# Altium PCB PCIEx16toMXM3.0.PcbDoc
Units mm, origin at the board's own origin, x right, y up, seen from the top; angles counter-clockwise.
Board outline 167.65 x 110.97 mm, 4 copper layers (F.Cu, In1.Cu, In2.Cu, B.Cu); 20 components, 219 nets, 511 pads, 0 vias.
Unrouted connection lines stored in the file: 135.
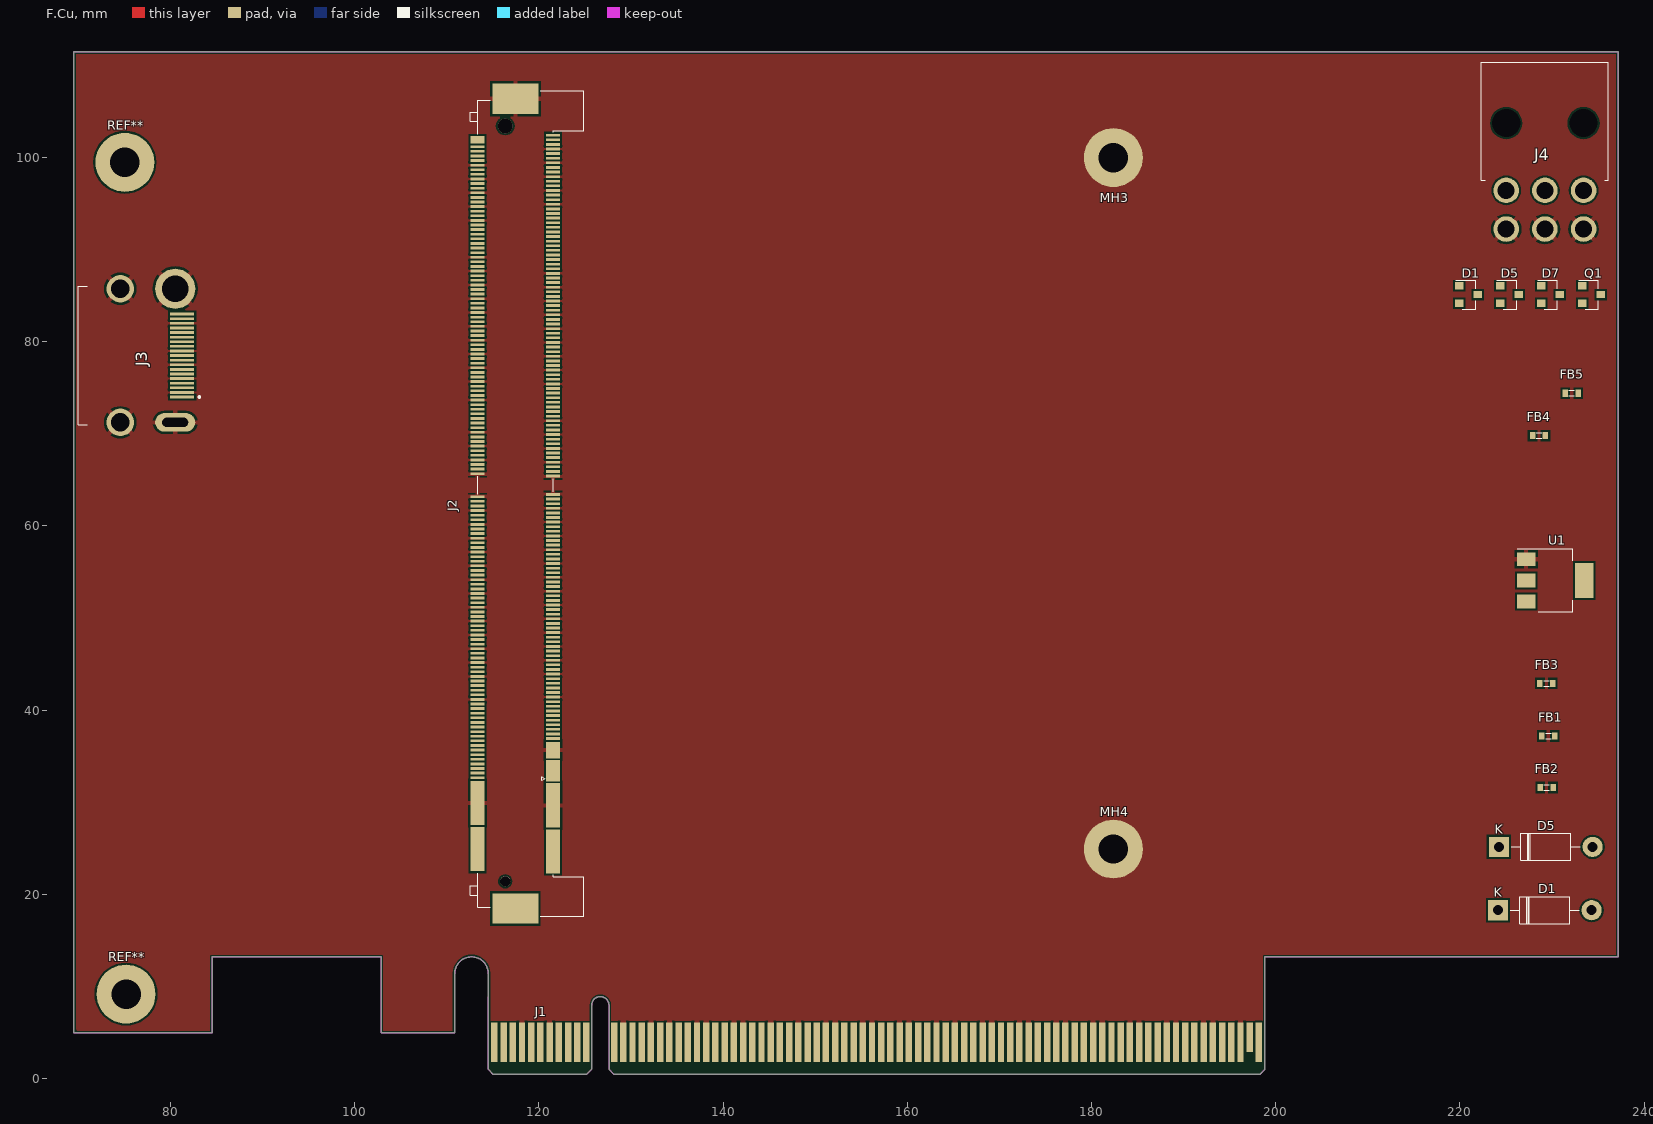
[diagram p0: F.Cu view]
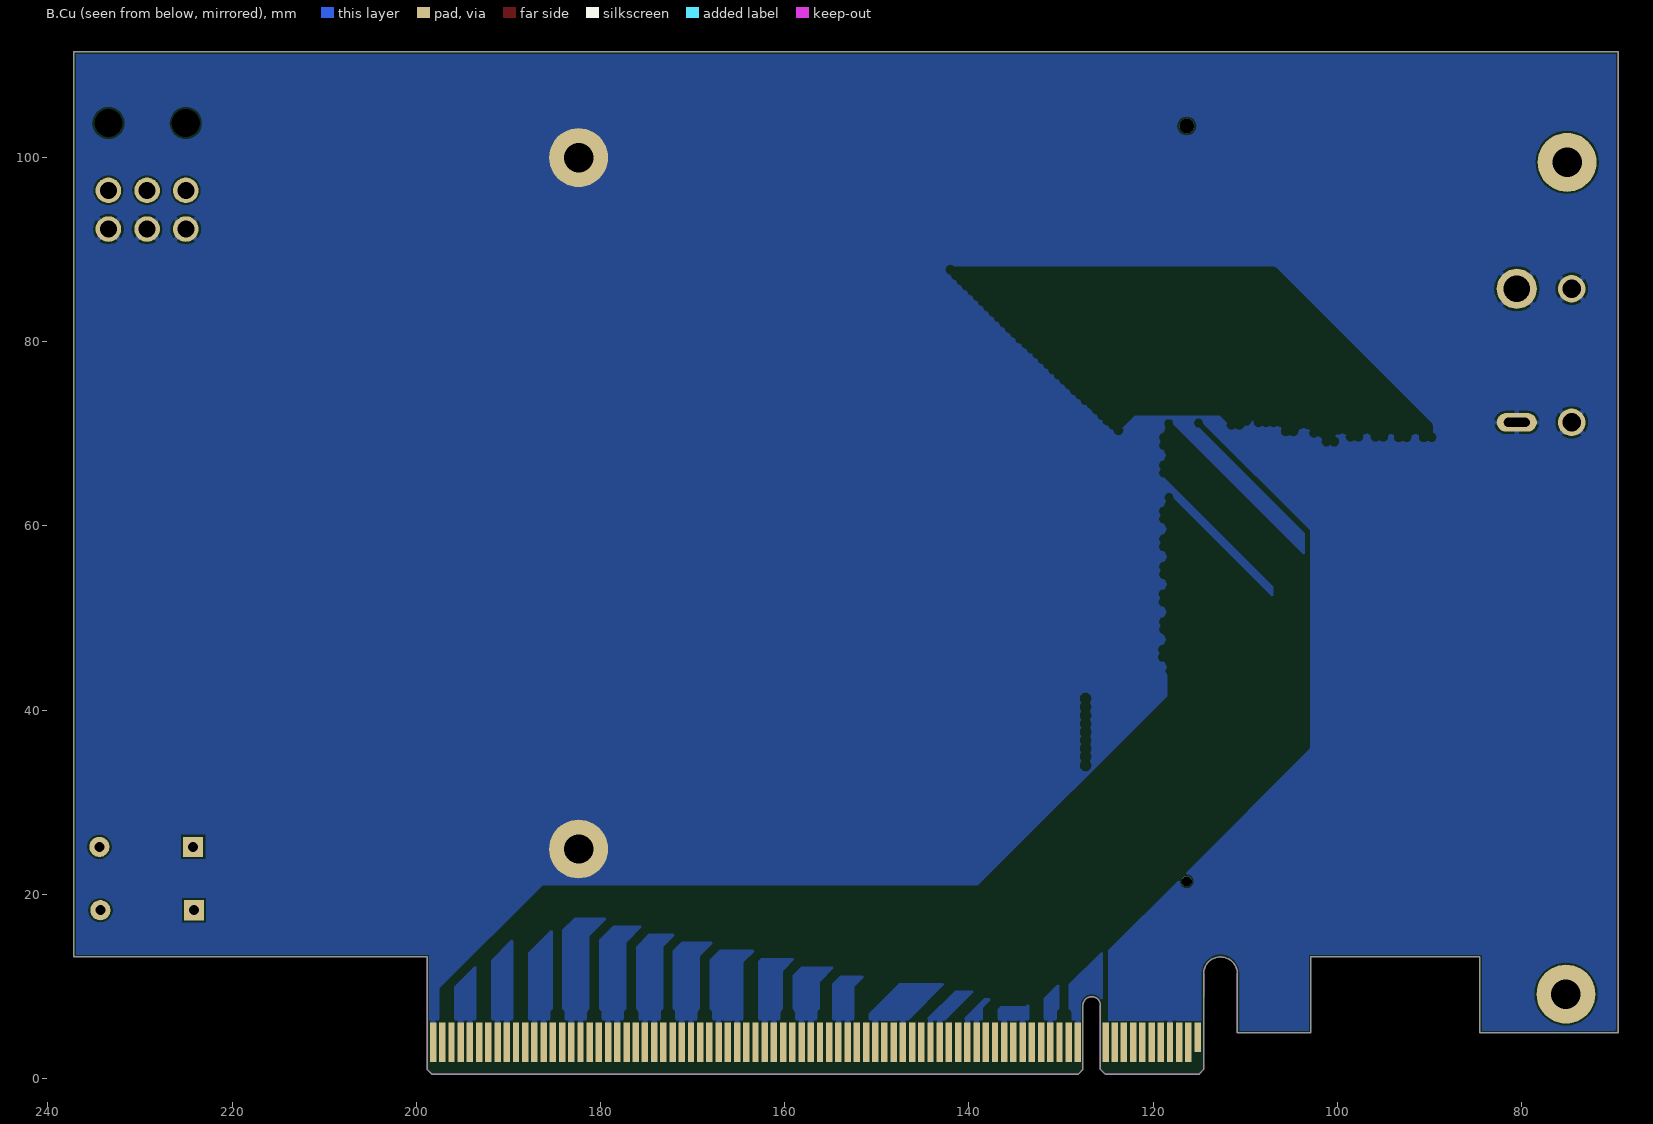
[diagram p1: B.Cu view, seen from below]

## Layer stack, top to bottom
F.Mask: solder mask 0.0102, Solder Resist, Dk 3.5
F.Cu: signal copper 0.0356
Dielectric 1: dielectric 0.32, FR-4, Dk 4.8
In1.Cu: signal copper 0.0356
Dielectric2: dielectric 0.32, FR-4, Dk 4.8
In2.Cu: signal copper 0.0356
Dielectric3: dielectric 0.32, FR-4, Dk 4.8
B.Cu: signal copper 0.0356
B.Mask: solder mask 0.0102, Solder Resist, Dk 3.5

## Board outline
198.82,13.22 198.82,8.9 198.82,1 198.32,0.5 128.12,0.5 127.62,1 127.62,7.95 ccw(c126.67,7.95) 125.72,7.95 125.72,1 125.22,0.5 115.02,0.5 114.52,1 114.52,8.9 114.52,11.395 ccw(c112.695,11.395) 110.87,4.97 102.87,4.97 102.87,13.22 84.52,13.22 84.52,4.97 69.52,4.97 69.532,111.47 237.17,111.47 237.17,13.22 198.82,13.22

## Design rules (kind name [scope] priority, off if disabled: settings)
Clearance "Clearence 0.2_NetClass" [InNetClass('Default')] p1: gap=0.2 ignorepadtopadclearanceinfootprint=FALSE
Clearance "Clearence 0.2_Polygon" [InNamedPolygon('B.Cu-GND') OR InNamedPolygon('F.Cu-GND')] p2: gap=0.2 ignorepadtopadclearanceinfootprint=FALSE
DiffPairsRouting [All] p1: maxlimit=0.254 minlimit=0.254 mostfreqgap=0.254 toplayer_minwidth=0.381 toplayer_maxwidth=0.381 toplayer_prefwidth=0.381 midlayer1_minwidth=0.381 midlayer1_maxwidth=0.381 midlayer1_prefwidth=0.381 midlayer2_minwidth=0.381 midlayer2_maxwidth=0.381 midlayer2_prefwidth=0.381 bottomlayer_minwidth=0.381 bottomlayer_maxwidth=0.381 bottomlayer_prefwidth=0.381 maxuncoupledlength=12.7
HoleSize "Hole Size (Default)" [All] p1: absolutevalues=TRUE maxlimit=10 minlimit=0 maxpercent=80.000 minpercent=20.000
MinimumSolderMaskSliver [All] p1: minsoldermaskwidth=0
PolygonConnect Polygon_F.Cu-GND_ConnectDirect [IsNamedPolygon('F.Cu-GND') vs IsVia] p1: connectstyle=Direct reliefconductorwidth=0.254 reliefentries=4 polygonreliefangle="90 Angle" airgapwidth=0.254
PolygonConnect Polygon_F.Cu-GND_ConnectRelief45 [IsNamedPolygon('F.Cu-GND') vs (IsThruPin or IsSMTPin) and (PadShape_AllLayers = 'Round')] p2: connectstyle=Relief reliefconductorwidth=0.508 reliefentries=4 polygonreliefangle="45 Angle" airgapwidth=0.25
PolygonConnect Polygon_F.Cu-GND_ConnectRelief90 [IsNamedPolygon('F.Cu-GND') vs (IsThruPin or IsSMTPin) and (PadShape_AllLayers <> 'Round')] p3: connectstyle=Relief reliefconductorwidth=0.508 reliefentries=4 polygonreliefangle="90 Angle" airgapwidth=0.25
PolygonConnect Polygon_B.Cu-GND_ConnectDirect [IsNamedPolygon('B.Cu-GND') vs IsVia] p4: connectstyle=Direct reliefconductorwidth=0.254 reliefentries=4 polygonreliefangle="90 Angle" airgapwidth=0.254
PolygonConnect Polygon_B.Cu-GND_ConnectRelief45 [IsNamedPolygon('B.Cu-GND') vs (IsThruPin or IsSMTPin) and (PadShape_AllLayers = 'Round')] p5: connectstyle=Relief reliefconductorwidth=0.508 reliefentries=4 polygonreliefangle="45 Angle" airgapwidth=0.25
PolygonConnect Polygon_B.Cu-GND_ConnectRelief90 [IsNamedPolygon('B.Cu-GND') vs (IsThruPin or IsSMTPin) and (PadShape_AllLayers <> 'Round')] p6: connectstyle=Relief reliefconductorwidth=0.508 reliefentries=4 polygonreliefangle="90 Angle" airgapwidth=0.25
RoutingVias [All] p1: holewidth=0.711 width=1.27 viastyle="Through Hole" minholewidth=0.711 minwidth=1.27 maxholewidth=0.711 maxwidth=1.27
SilkToSilkClearance [All] p1: silktosilkclearance=0
SilkToSolderMaskClearance [IsPad] p1: minsilkscreentomaskgap=0 clearancetoexposedcopper=TRUE
SolderMaskExpansion [All] p1: expansion=0.102 istentingtop=FALSE
Width [All] p1: maxlimit=10 minlimit=0.2 preferedwidth=0.254 toplayer_prefwidth=0.25 midlayer1_minwidth=0.254 midlayer1_maxwidth=0.254 midlayer2_minwidth=0.254 midlayer2_maxwidth=0.254 bottomlayer_prefwidth=0.25 minimp=50.000000 maximp=50.000000 favimp=50.000000
25 further rules are at their usual default settings.

## Classes and differential pairs
differential pair PET15: +PET15_P -PET15_N
differential pair PET14: +PET14_P -PET14_N
differential pair PET13: +PET13_P -PET13_N
differential pair PET12: +PET12_P -PET12_N
differential pair PET11: +PET11_P -PET11_N
differential pair PET10: +PET10_P -PET10_N
differential pair PET9: +PET9_P -PET9_N
differential pair PET8: +PET8_P -PET8_N
differential pair PET7: +PET7_P -PET7_N
differential pair PET6: +PET6_P -PET6_N
differential pair PET5: +PET5_P -PET5_N
differential pair PET4: +PET4_P -PET4_N
differential pair PET3: +PET3_P -PET3_N
differential pair PET2: +PET2_P -PET2_N
differential pair PET1: +PET1_P -PET1_N
differential pair PET0: +PET0_P -PET0_N
differential pair PER15: +PER15_P -PER15_N
differential pair PER14: +PER14_P -PER14_N
differential pair PER13: +PER13_P -PER13_N
differential pair PER12: +PER12_P -PER12_N
differential pair PER11: +PER11_P -PER11_N
differential pair PER10: +PER10_P -PER10_N
differential pair PER9: +PER9_P -PER9_N
differential pair PER8: +PER8_P -PER8_N
differential pair PER7: +PER7_P -PER7_N
differential pair PER6: +PER6_P -PER6_N
differential pair PER5: +PER5_P -PER5_N
differential pair PER4: +PER4_P -PER4_N
differential pair PER3: +PER3_P -PER3_N
differential pair PER2: +PER2_P -PER2_N
differential pair PER1: +PER1_P -PER1_N
differential pair PER0: +PER0_P -PER0_N

## Components (designator, comment, footprint, x,y, rotation, side; value= is the part's Value field where it differs from the comment)
D1 "PMEG4010ET" D_SOT-23_ANK 220.925,85.121 r0 top
D1 "1N4007" D_DO-41_SOD81_P10.16mm_Horizontal 224.124,18.291 r0 top
D5 "1N4007" D_DO-41_SOD81_P10.16mm_Horizontal 224.231,25.159 r0 top
D5 "PMEG4010ET" D_SOT-23_ANK 225.375,85.121 r0 top
D7 "PMEG4010ET" D_SOT-23_ANK 229.825,85.121 r0 top
FB1 "BLM18PG121SN1D" 0603 229.591,37.199 r0 top
FB2 "BLM18PG121SN1D" 0603 229.402,31.611 r0 top
FB3 "BLM18PG121SN1D" 0603 229.384,42.901 r0 top
FB4 "BLM18PG121SN1D" 0603 228.58,69.816 r0 top
FB5 "BLM18PG121SN1D" 0603 232.13,74.416 r0 top
J1 "Bus_PCI_Express_x16" BUS_PCIexpress_x16 115.17,3.95 r0 top
J2 "MXM3.0" JAE_MM70-314-310B1 117.45,62.421 r90 top
J3 "208658-1081" 2086581081 76.048,78.499 r270 top
J4 "45558-0003" 455580003 225.019,96.431 r0 top
MH3 "MountingHole_3.2mm_M3_Pad" MountingHole_3.2mm_M3_Pad 182.372,99.987 r180 top
MH4 "MountingHole_3.2mm_M3_Pad" MountingHole_3.2mm_M3_Pad 182.372,24.93 r0 top
Q1 "BC848" SOT-23 234.275,85.121 r0 top
REF** "MountingHole_3.2mm_M3_Pad" MountingHole_3.2mm_M3_Pad 75.057,99.479 r0 top
REF** "MountingHole_3.2mm_M3_Pad" MountingHole_3.2mm_M3_Pad 75.184,9.182 r0 top
U1 "AMS1117-5.0" SOT-223-3_TabPin2 230.327,54.09 r0 top

## Footprints (in the part's own frame and the unit in brackets; to place one, negate y for a bottom-side part, rotate by r counter-clockwise, add the part's x,y. Pads: shape width x height; smd on the part's side, far side on the other; paste and mask are expansions set on the pad)
0603 [mm]
  rect 0.6x0.8 smd mask+0.05: 1(-0.7,0) 2(0.7,0)
  silkscreen extent -0.3,-0.3 0.3,0.3
455580003 [mm]
  round 2.775 hole 1.85 paste-2.775 mask+0.05: 1(0,0) 2(4.2,0) 3(8.4,0) 4(0,-4.2) 5(4.2,-4.2) 6(8.4,-4.2)
  oval 3.05x0 hole 3.05 paste-3.05 mask+0.05: MH1(0,7.3) MH2(8.4,7.3)
  silkscreen extent -2.7,1.1 11.1,13.9
2086581081 [mm]
  rect 0.3x2.6 smd mask+0.05: 1(4.5,5.235) 2(4,5.235) 3(3.5,5.235) 4(3,5.235) 5(2.5,5.235) 6(2,5.235) 7(1.5,5.235) 8(1,5.235) 9(0.5,5.235) 10(0,5.235) 11(-0.5,5.235) 12(-1,5.235) 13(-1.5,5.235) 14(-2,5.235) 15(-2.5,5.235) 16(-3,5.235) 17(-3.5,5.235) 18(-4,5.235) 19(-4.5,5.235)
  round 4.365 hole 2.91 paste-4.365 mask+0.05: MH1(-7.25,4.475)
  rrect100% 2x4.365 hole 2.8 slot 1 at 0 deg paste-4.365 mask+0.05: MH2(7.25,4.475)
  round 2.985 hole 1.99 paste-2.985 mask+0.05: MH3(-7.25,-1.485) MH4(7.25,-1.485)
  silkscreen extent -7.5,-6.08 7.5,7.2
BUS_PCIexpress_x16 [mm]
  rect 0.7x3.2 smd far side paste-3.2 mask+0.05: A1(0,0.55)
  rect 0.7x4.3 smd far side paste-4.3 mask+0.05: A2(1,0) A3(2,0) A4(3,0) A5(4,0) A6(5,0) A7(6,0) A8(7,0) A9(8,0) A10(9,0) A11(10,0) A12(13,0) A13(14,0) A14(15,0) A15(16,0) A16(17,0) A17(18,0) A18(19,0) A19(20,0) A20(21,0) A21(22,0) A22(23,0) A23(24,0) A24(25,0) A25(26,0) A26(27,0) A27(28,0) A28(29,0) A29(30,0) A30(31,0) A31(32,0) A32(33,0) A33(34,0) A34(35,0) A35(36,0) A36(37,0) A37(38,0) A38(39,0) A39(40,0) A40(41,0) A41(42,0) A42(43,0) A43(44,0) A44(45,0) A45(46,0) A46(47,0) A47(48,0) A48(49,0) A49(50,0) A50(51,0) A51(52,0) A52(53,0) A53(54,0) A54(55,0) A55(56,0) A56(57,0) A57(58,0) A58(59,0) A59(60,0) A60(61,0) A61(62,0) A62(63,0) A63(64,0) A64(65,0) A65(66,0) A66(67,0) A67(68,0) A68(69,0) A69(70,0) A70(71,0) A71(72,0) A72(73,0) A73(74,0) A74(75,0) A75(76,0) A76(77,0) A77(78,0) A78(79,0) A79(80,0) A80(81,0) A81(82,0) A82(83,0)
  rect 0.7x4.3 smd paste-4.3 mask+0.05: B1(0,0) B2(1,0) B3(2,0) B4(3,0) B5(4,0) B6(5,0) B7(6,0) B8(7,0) B9(8,0) B10(9,0) B11(10,0) B12(13,0) B13(14,0) B14(15,0) B15(16,0) B16(17,0) B17(18,0) B18(19,0) B19(20,0) B20(21,0) B21(22,0) B22(23,0) B23(24,0) B24(25,0) B25(26,0) B26(27,0) B27(28,0) B28(29,0) B29(30,0) B30(31,0) B31(32,0) B32(33,0) B33(34,0) B34(35,0) B35(36,0) B36(37,0) B37(38,0) B38(39,0) B39(40,0) B40(41,0) B41(42,0) B42(43,0) B43(44,0) B44(45,0) B45(46,0) B46(47,0) B47(48,0) B48(49,0) B49(50,0) B50(51,0) B51(52,0) B52(53,0) B53(54,0) B54(55,0) B55(56,0) B56(57,0) B57(58,0) B58(59,0) B59(60,0) B60(61,0) B61(62,0) B62(63,0) B63(64,0) B64(65,0) B65(66,0) B66(67,0) B67(68,0) B68(69,0) B69(70,0) B70(71,0) B71(72,0) B72(73,0) B73(74,0) B74(75,0) B75(76,0) B76(77,0) B77(78,0) B78(79,0) B79(80,0) B80(81,0) B82(83,0)
  rect 0.7x3.2 smd paste-3.2 mask+0.05: B81(82,0.55)
D_DO-41_SOD81_P10.16mm_Horizontal [mm]
  rect 2.2x2.2 hole 1.1 paste-2.2 mask+0.05: 1(0,0)
  rrect100% 2.2x2.2 hole 1.1 paste-2.2 mask+0.05: 2(10.16,0)
  silkscreen extent 1.34,-1.47 8.82,1.47
D_SOT-23_ANK [mm]
  rect 0.9x0.8 smd mask+0.05: 1(1,0) 2(-1,0.95) Un1(-1,-0.95)
  silkscreen extent -1.4,-1.58 0.76,1.58
JAE_MM70-314-310B1 [mm]
  rect 2.3x1.5 smd mask+0.05: 1(-29,-4.1) 3(-29,-4.1) 5(-29,-4.1) 7(-29,-4.1) 9(-29,-4.1)
  rect 0.3x1.5 smd mask+0.05: 2(-29.75,4.1) 4(-29.25,4.1) 6(-28.75,4.1) 8(-28.25,4.1) 10(-27.75,4.1) 12(-27.25,4.1) 14(-26.75,4.1) 16(-26.25,4.1) 18(-25.75,4.1) 19(-25.5,-4.1) 20(-25.25,4.1) 21(-25,-4.1) 22(-24.75,4.1) 23(-24.5,-4.1) 24(-24.25,4.1) 25(-24,-4.1) 26(-23.75,4.1) 27(-23.5,-4.1) 28(-23.25,4.1) 29(-23,-4.1) 30(-22.75,4.1) 31(-22.5,-4.1) 32(-22.25,4.1) 33(-22,-4.1) 34(-21.75,4.1) 35(-21.5,-4.1) 36(-21.25,4.1) 37(-21,-4.1) 38(-20.75,4.1) 39(-20.5,-4.1) 40(-20.25,4.1) 41(-20,-4.1) 42(-19.75,4.1) 43(-19.5,-4.1) 44(-19.25,4.1) 45(-19,-4.1) 46(-18.75,4.1) 47(-18.5,-4.1) 48(-18.25,4.1) 49(-18,-4.1) 50(-17.75,4.1) 51(-17.5,-4.1) 52(-17.25,4.1) 53(-17,-4.1) 54(-16.75,4.1) 55(-16.5,-4.1) 56(-16.25,4.1) 57(-16,-4.1) 58(-15.75,4.1) 59(-15.5,-4.1) 60(-15.25,4.1) 61(-15,-4.1) 62(-14.75,4.1) 63(-14.5,-4.1) 64(-14.25,4.1) 65(-14,-4.1) 66(-13.75,4.1) 67(-13.5,-4.1) 68(-13.25,4.1) 69(-13,-4.1) 70(-12.75,4.1) 71(-12.5,-4.1) 72(-12.25,4.1) 73(-12,-4.1) 74(-11.75,4.1) 75(-11.5,-4.1) 76(-11.25,4.1) 77(-11,-4.1) 78(-10.75,4.1) 79(-10.5,-4.1) 80(-10.25,4.1) 81(-10,-4.1) 82(-9.75,4.1) 83(-9.5,-4.1) 84(-9.25,4.1) 85(-9,-4.1) 86(-8.75,4.1) 87(-8.5,-4.1) 88(-8.25,4.1) 89(-8,-4.1) 90(-7.75,4.1) 91(-7.5,-4.1) 92(-7.25,4.1) 93(-7,-4.1) 94(-6.75,4.1) 95(-6.5,-4.1) 96(-6.25,4.1) 97(-6,-4.1) 98(-5.75,4.1) 99(-5.5,-4.1) 100(-5.25,4.1) 101(-5,-4.1) 102(-4.75,4.1) 103(-4.5,-4.1) 104(-4.25,4.1) 105(-4,-4.1) 106(-3.75,4.1) 107(-3.5,-4.1) 108(-3.25,4.1) 109(-3,-4.1) 110(-2.75,4.1) 111(-2.5,-4.1) 112(-2.25,4.1) 113(-2,-4.1) 114(-1.75,4.1) 115(-1.5,-4.1) 116(-1.25,4.1) 117(-1,-4.1) 118(-0.75,4.1) 119(-0.5,-4.1) 120(-0.25,4.1) 121(0,-4.1) 122(0.25,4.1) 123(0.5,-4.1) 124(0.75,4.1) 125(1,-4.1) 133(3,-4.1) 134(3.25,4.1) 135(3.5,-4.1) 136(3.75,4.1) 137(4,-4.1) 138(4.25,4.1) 139(4.5,-4.1) 140(4.75,4.1) 141(5,-4.1) 142(5.25,4.1) 143(5.5,-4.1) 144(5.75,4.1) 145(6,-4.1) 146(6.25,4.1) 147(6.5,-4.1) 148(6.75,4.1) 149(7,-4.1) 150(7.25,4.1) 151(7.5,-4.1) 152(7.75,4.1) 153(8,-4.1) 154(8.25,4.1) 155(8.5,-4.1) 156(8.75,4.1) 157(9,-4.1) 158(9.25,4.1) 159(9.5,-4.1) 160(9.75,4.1) 161(10,-4.1) 162(10.25,4.1) 163(10.5,-4.1) 164(10.75,4.1) 165(11,-4.1) 166(11.25,4.1) 167(11.5,-4.1) 168(11.75,4.1) 169(12,-4.1) 170(12.25,4.1) 171(12.5,-4.1) 172(12.75,4.1) 173(13,-4.1) 174(13.25,4.1) 175(13.5,-4.1) 176(13.75,4.1) 177(14,-4.1) 178(14.25,4.1) 179(14.5,-4.1) 180(14.75,4.1) 181(15,-4.1) 182(15.25,4.1) 183(15.5,-4.1) 184(15.75,4.1) 185(16,-4.1) 186(16.25,4.1) 187(16.5,-4.1) 188(16.75,4.1) 189(17,-4.1) 190(17.25,4.1) 191(17.5,-4.1) 192(17.75,4.1) 193(18,-4.1) 194(18.25,4.1) 195(18.5,-4.1) 196(18.75,4.1) 197(19,-4.1) 198(19.25,4.1) 199(19.5,-4.1) 200(19.75,4.1) 201(20,-4.1) 202(20.25,4.1) 203(20.5,-4.1) 204(20.75,4.1) 205(21,-4.1) 206(21.25,4.1) 207(21.5,-4.1) 208(21.75,4.1) 209(22,-4.1) 210(22.25,4.1) 211(22.5,-4.1) 212(22.75,4.1) 213(23,-4.1) 214(23.25,4.1) 215(23.5,-4.1) 216(23.75,4.1) 217(24,-4.1) 218(24.25,4.1) 219(24.5,-4.1) 220(24.75,4.1) 221(25,-4.1) 222(25.25,4.1) 223(25.5,-4.1) 224(25.75,4.1) 225(26,-4.1) 226(26.25,4.1) 227(26.5,-4.1) 228(26.75,4.1) 229(27,-4.1) 230(27.25,4.1) 231(27.5,-4.1) 232(27.75,4.1) 233(28,-4.1) 234(28.25,4.1) 235(28.5,-4.1) 236(28.75,4.1) 237(29,-4.1) 238(29.25,4.1) 239(29.5,-4.1) 240(29.75,4.1) 241(30,-4.1) 242(30.25,4.1) 243(30.5,-4.1) 244(30.75,4.1) 245(31,-4.1) 246(31.25,4.1) 247(31.5,-4.1) 248(31.75,4.1) 249(32,-4.1) 250(32.25,4.1) 251(32.5,-4.1) 252(32.75,4.1) 253(33,-4.1) 254(33.25,4.1) 255(33.5,-4.1) 256(33.75,4.1) 257(34,-4.1) 258(34.25,4.1) 259(34.5,-4.1) 260(34.75,4.1) 261(35,-4.1) 262(35.25,4.1) 263(35.5,-4.1) 264(35.75,4.1) 265(36,-4.1) 266(36.25,4.1) 267(36.5,-4.1) 268(36.75,4.1) 269(37,-4.1) 270(37.25,4.1) 271(37.5,-4.1) 272(37.75,4.1) 273(38,-4.1) 274(38.25,4.1) 275(38.5,-4.1) 276(38.75,4.1) 277(39,-4.1) 279(39.5,-4.1) 281(40,-4.1)
  rect 1.8x1.5 smd mask+0.05: 11(-26.75,-4.1) 13(-26.75,-4.1) 15(-26.75,-4.1) 17(-26.75,-4.1)
  rect 0.8x1.5 smd mask+0.05: 278(39.5,4.1) 280(39.5,4.1)
  rect 4.8x1.5 smd mask+0.05: E1(-37.75,-4.1) E2(-37.5,4.1) E3(-32.75,-4.1) E4(-32.5,4.1)
  rect 3.3x5 smd mask+0.05: MP(-43.95,0) MP(43.95,0)
  round 1.1 hole 1.1 paste-1.1 mask+0.05: Un1(-41,1.1)
  round 1.6 hole 1.6 paste-1.6 mask+0.05: Un2(41,1.1)
  silkscreen extent -44.8,-7.45 44.8,4.9
MountingHole_3.2mm_M3_Pad [mm]
  round 6.4 hole 3.2 paste-6.4 mask+0.05: 1(0,0)
SOT-23 [mm]
  rect 0.9x0.8 smd mask+0.05: 1(-1,0.95) 2(-1,-0.95) 3(1,0)
  silkscreen extent -1.4,-1.58 0.76,1.58
SOT-223-3_TabPin2 [mm]
  rect 2x1.5 smd mask+0.05: 1(-3.15,2.3) 2(-3.15,0) 3(-3.15,-2.3)
  rect 2x3.8 smd mask+0.05: 2(3.15,0)
  silkscreen extent -4.1,-3.41 1.91,3.41

## Part data
D1: library part D_SOT-23_ANK, "SOT-23, Single Diode"
D1: library part PMEG4010ET
D5: library part D_DO-41_SOD81_P10.16mm_Horizontal, "Diode, DO-41_SOD81 series, Axial, Horizontal, pin pitch=10.16mm, , length*diameter=5.2*2.7mm^2, , http://www.diodes.com/_files/packages/DO-41%20(Plastic).pdf"
FB1 FB2 FB3 FB4 FB5: library part BLM18PG121SN1D-dk_Ferrite-Beads-and-Chips
MH3 MH4 REF** REF**: "Mounting Hole 3.2mm, M3"

## Nets (pads, with @x,y where several pads share a name; then routed paths per layer and width w, separated by ;. In a path a pad name is that pad's centre, name@x,y a point inside that pad or via, vN(x,y) a via of type N, cw(c..) or ccw(c..) an arc to the next point about the centre after c; other vN are vias at no path point)
+3.3VA: J1.B10 Q1.3
+3V3: J1.A9 J1.A10 J1.B8 J2.278 J2.280
+5V: D5.1@224.231,25.159 J2.1 J2.3 J2.5 J2.7 J2.9 J3.18
+12V: D1.2 D7.2 J1.A2 J1.A3 J1.B1 J1.B2 J1.B3 J2.E1 J2.E2 J4.1 J4.2 J4.3
C1: FB5.1
C2: FB4.2
C3: FB3.2
C4: FB1.2
CEC: J2.29 J3.13
CK_N: J2.176 J3.12
CK_P: J2.178 J3.10
D0_N: J2.200 J3.9
D0_P: J2.202 J3.7
D1_N: J2.194 J3.6
D1_P: J2.196 J3.4
D2_N: J2.188 J3.3
D2_P: J2.190 J3.1
DP_A_HPD: J2.276
DP_D_AUX: J2.232
DP_D_AUX#: J2.230
DP_D_HPD: J2.236
DP_D_L3: J2.208 J2.214 J2.220 J2.226
DP_D_L3#: J2.206 J2.212 J2.218 J2.224
Enable: J2.8
GND: J1.A4 J1.A12 J1.A15 J1.A18 J1.A20 J1.A23 J1.A24 J1.A27 J1.A28 J1.A31 J1.A34 J1.A37 J1.A38 J1.A41 J1.A42 J1.A45 J1.A46 J1.A49 J1.A51 J1.A54 J1.A55 J1.A58 J1.A59 J1.A62 J1.A63 J1.A66 J1.A67 J1.A70 J1.A71 J1.A74 J1.A75 J1.A78 J1.A79 J1.A82 J1.B4 J1.B7 J1.B13 J1.B16 J1.B18 J1.B21 J1.B22 J1.B25 J1.B26 J1.B29 J1.B32 J1.B35 J1.B36 J1.B39 J1.B40 J1.B43 J1.B44 J1.B47 J1.B49 J1.B52 J1.B53 J1.B56 J1.B57 J1.B60 J1.B61 J1.B64 J1.B65 J1.B68 J1.B69 J1.B72 J1.B73 J1.B76 J1.B77 J1.B80 J2.11 J2.13 J2.15 J2.17 J2.36 J2.37 J2.46 J2.47 J2.52 J2.53 J2.58 J2.59 J2.64 J2.65 J2.70 J2.71 J2.76 J2.77 J2.82 J2.83 J2.88 J2.89 J2.94 J2.95 J2.100 J2.101 J2.106 J2.107 J2.112 J2.113 J2.118 J2.119 J2.124 J2.125 J2.133 J2.134 J2.139 J2.140 J2.145 J2.146 J2.151 J2.152 J2.157 J2.166 J2.173 J2.174 J2.179 J2.180 J2.185 J2.186 J2.191 J2.192 J2.197 J2.198 J2.203 J2.204 J2.209 J2.210 J2.215 J2.216 J2.221 J2.222 J2.228 J2.244 J2.250 J2.251 J2.256 J2.257 J2.262 J2.263 J2.268 J2.269 J2.275 J2.E3 J2.E4 J2.MP@117.45,106.371 J3.2 J3.5 J3.8 J3.11 J3.17 J3.MH1 J3.MH2 J3.MH3 J3.MH4 J4.4 J4.5 J4.6 MH3.1 MH4.1 U1.1
Net-(C1-Pad1): D1.1 U1.3
Net-(C4-Pad1): J2.279
Net-(C5-Pad1): J2.277
Net-(C6-Pad1): J2.273
Net-(C7-Pad1): J2.271
Net-(C8-Pad1): J2.267
Net-(C9-Pad1): J2.265
Net-(C10-Pad1): J2.261
Net-(C11-Pad1): J2.259
Net-(C12-Pad1): J2.255
Net-(C13-Pad1): J2.253
Net-(C14-Pad2): D5.1@226.375,85.121
Net-(D5-Pad2): D5.2 U1.2
Net-(D7-Pad1): D7.1
Net-(FB1-Pad1): FB1.1 J2.164
Net-(FB2-Pad1): FB2.1 J2.162
Net-(FB3-Pad1): FB3.1 J2.172
Net-(FB4-Pad1): FB4.1 J2.170
Net-(FB5-Pad2): FB5.2 J2.168
Net-(J1-PadA1): J1.A1 J1.B17
Net-(J1-PadA5): J1.A5
Net-(J1-PadA6): J1.A6
Net-(J1-PadA7): J1.A7
Net-(J1-PadA8): J1.A8
Net-(J1-PadA19): J1.A19
Net-(J1-PadA32): J1.A32
Net-(J1-PadA33): J1.A33
Net-(J1-PadA50): J1.A50
Net-(J1-PadB9): J1.B9
Net-(J1-PadB12): J1.B12
Net-(J1-PadB30): J1.B30
Net-(J1-PadB31): J1.B31
Net-(J1-PadB48): J1.B48
Net-(J1-PadB81): J1.B81
Net-(J1-PadB82): J1.B82
Net-(J2-Pad6): J2.6
Net-(J2-Pad10): J2.10
Net-(J2-Pad12): J2.12
Net-(J2-Pad14): J2.14
Net-(J2-Pad16): J2.16
Net-(J2-Pad18): J2.18
Net-(J2-Pad19): J2.19
Net-(J2-Pad22): J2.22
Net-(J2-Pad23): J2.23
Net-(J2-Pad25): J2.25
Net-(J2-Pad26): J2.26
Net-(J2-Pad27): J2.27
Net-(J2-Pad28): J2.28
Net-(J2-Pad30): J2.30
Net-(J2-Pad38): J2.38
Net-(J2-Pad39): J2.39
Net-(J2-Pad40): J2.40
Net-(J2-Pad41): J2.41
Net-(J2-Pad42): J2.42
Net-(J2-Pad43): J2.43
Net-(J2-Pad44): J2.44
Net-(J2-Pad45): J2.45
Net-(J2-Pad154): J2.154
Net-(J2-Pad158): J2.158
Net-(J2-Pad159): J2.159
Net-(J2-Pad160): J2.160
Net-(J2-Pad161): J2.161
Net-(J2-Pad163): J2.163
Net-(J2-Pad165): J2.165
Net-(J2-Pad167): J2.167
Net-(J2-Pad169): J2.169
Net-(J2-Pad171): J2.171
Net-(J2-Pad175): J2.175
Net-(J2-Pad177): J2.177
Net-(J2-Pad181): J2.181
Net-(J2-Pad182): J2.182
Net-(J2-Pad183): J2.183
Net-(J2-Pad184): J2.184
Net-(J2-Pad187): J2.187
Net-(J2-Pad189): J2.189
Net-(J2-Pad193): J2.193
Net-(J2-Pad195): J2.195
Net-(J2-Pad199): J2.199
Net-(J2-Pad201): J2.201
Net-(J2-Pad205): J2.205
Net-(J2-Pad207): J2.207
Net-(J2-Pad211): J2.211
Net-(J2-Pad213): J2.213
Net-(J2-Pad217): J2.217
Net-(J2-Pad219): J2.219
Net-(J2-Pad223): J2.223
Net-(J2-Pad225): J2.225
Net-(J2-Pad227): J2.227
Net-(J2-Pad229): J2.229
Net-(J2-Pad231): J2.231
Net-(J2-Pad233): J2.233
Net-(J2-Pad234): J2.234
Net-(J2-Pad235): J2.235
Net-(J2-Pad237): J2.237
Net-(J2-Pad238): J2.238
Net-(J2-Pad239): J2.239
Net-(J2-Pad240): J2.240
Net-(J2-Pad241): J2.241
Net-(J2-Pad242): J2.242
Net-(J2-Pad243): J2.243
Net-(J2-Pad245): J2.245
Net-(J2-Pad246): J2.246
Net-(J2-Pad247): J2.247
Net-(J2-Pad248): J2.248
Net-(J2-Pad249): J2.249
Net-(J2-Pad252): J2.252
Net-(J2-Pad254): J2.254
Net-(J2-Pad258): J2.258
Net-(J2-Pad260): J2.260
Net-(J2-Pad264): J2.264
Net-(J2-Pad266): J2.266
Net-(J2-Pad270): J2.270
Net-(J2-Pad272): J2.272
Net-(J2-Pad274): J2.274
Net-(J2-Pad281): J2.281
Net-(J3-Pad14): J3.14
PER0_N: J1.A17 J2.147
PER0_P: J1.A16 J2.149
PER1_N: J1.A22 J2.141
PER1_P: J1.A21 J2.143
PER2_N: J1.A26 J2.135
PER2_P: J1.A25 J2.137
PER3_N: J1.A30 J2.121
PER3_P: J1.A29 J2.123
PER4_N: J1.A36 J2.115
PER4_P: J1.A35 J2.117
PER5_N: J1.A40 J2.109
PER5_P: J1.A39 J2.111
PER6_N: J1.A44 J2.103
PER6_P: J1.A43 J2.105
PER7_N: J1.A48 J2.97
PER7_P: J1.A47 J2.99
PER8_N: J1.A53 J2.91
PER8_P: J1.A52 J2.93
PER9_N: J1.A57 J2.85
PER9_P: J1.A56 J2.87
PER10_N: J1.A61 J2.79
PER10_P: J1.A60 J2.81
PER11_N: J1.A65 J2.73
PER11_P: J1.A64 J2.75
PER12_N: J1.A69 J2.67
PER12_P: J1.A68 J2.69
PER13_N: J1.A73 J2.61
PER13_P: J1.A72 J2.63
PER14_N: J1.A77 J2.55
PER14_P: J1.A76 J2.57
PER15_N: J1.A81 J2.49
PER15_P: J1.A80 J2.51
PERST: J1.A11 J2.156 Q1.2
PET0_N: J1.B15 J2.148
PET0_P: J1.B14 J2.150
PET1_N: J1.B20 J2.142
PET1_P: J1.B19 J2.144
PET2_N: J1.B24 J2.136
PET2_P: J1.B23 J2.138
PET3_N: J1.B28 J2.120
PET3_P: J1.B27 J2.122
PET4_N: J1.B34 J2.114
PET4_P: J1.B33 J2.116
PET5_N: J1.B38 J2.108
PET5_P: J1.B37 J2.110
PET6_N: J1.B42 J2.102
PET6_P: J1.B41 J2.104
PET7_N: J1.B46 J2.96
PET7_P: J1.B45 J2.98
PET8_N: J1.B51 J2.90
PET8_P: J1.B50 J2.92
PET9_N: J1.B55 J2.84
PET9_P: J1.B54 J2.86
PET10_N: J1.B59 J2.78
PET10_P: J1.B58 J2.80
PET11_N: J1.B63 J2.72
PET11_P: J1.B62 J2.74
PET12_N: J1.B67 J2.66
PET12_P: J1.B66 J2.68
PET13_N: J1.B71 J2.60
PET13_P: J1.B70 J2.62
PET14_N: J1.B75 J2.54
PET14_P: J1.B74 J2.56
PET15_N: J1.B79 J2.48
PET15_P: J1.B78 J2.50
PRSNT_R#: J2.2
REFCLK_N: J1.A14 J2.153
REFCLK_P: J1.A13 J2.155
SMCLK: J1.B5 J2.34
SMDAT: J1.B6 J2.32
TH_OVERT#: J2.20 Q1.1
TH_PWM: J2.24
TMDS_HPD: J2.31 J3.19
TMDS_SCL: J2.35 J3.15
TMDS_SDA: J2.33 J3.16
VGA_DISABLE#: J2.21
VGA_VS: FB2.2
WAKE: J1.B11 J2.4
pads on no net: D1.Un1 D5.Un1 D7.Un1 J2.MP@117.45,18.471 J2.Un1 J2.Un2 J4.MH1 J4.MH2 REF**.1

## Polygon pours and split planes (outlines as drawn)
GND on B.Cu "B.Cu-GND" (solid, remove dead copper, pour order 0): 237.16,111.468 237.16,5.093 69.52,4.966 69.545,111.468
GND on F.Cu "F.Cu-GND" (solid, remove dead copper, pour order 1): 237.16,111.464 237.16,5.089 69.52,4.962 69.545,111.464

## Keep-outs
Edge.Cuts:
  lines w0.1: 69.52,4.97 69.532,111.47 ; 69.52,4.97 84.52,4.97 ; 69.52,4.97 69.532,111.47 ; 69.52,4.97 84.52,4.97 ; 69.532,111.47 237.17,111.47 ; 69.532,111.47 237.17,111.47 ; 84.52,4.97 84.52,13.22 ; 84.52,4.97 84.52,13.22 ; 84.52,13.22 102.87,13.22 ; 84.52,13.22 102.87,13.22 ; 102.87,4.97 102.87,13.22 ; 102.87,4.97 110.87,4.97 ; 102.87,4.97 102.87,13.22 ; 102.87,4.97 110.87,4.97 ; 110.87,4.97 110.87,11.395 ; 110.87,4.97 110.87,11.395 ; 110.87,11.395 cw(c112.695,11.395) 114.52,11.395 ; 110.87,11.395 cw(c112.695,11.395) 114.52,11.395 ; 114.52,1 114.52,8.9 ; 114.52,1 115.02,0.5 ; 114.52,1 114.52,8.9 ; 114.52,1 115.02,0.5 ; 114.52,8.9 114.52,11.395 ; 114.52,8.9 114.52,11.395 ; 115.02,0.5 125.22,0.5 ; 115.02,0.5 125.22,0.5 ; 125.22,0.5 125.72,1 ; 125.22,0.5 125.72,1 ; 125.72,1 125.72,7.95 ; 125.72,1 125.72,7.95 ; 125.72,7.95 cw(c126.67,7.95) 127.62,7.95 ; 125.72,7.95 cw(c126.67,7.95) 127.62,7.95 ; 127.62,1 127.62,7.95 ; 127.62,1 128.12,0.5 ; 127.62,1 127.62,7.95 ; 127.62,1 128.12,0.5 ; 128.12,0.5 198.32,0.5 ; 128.12,0.5 198.32,0.5 ; 198.32,0.5 198.82,1 ; 198.32,0.5 198.82,1 ; 198.82,1 198.82,8.9 ; 198.82,1 198.82,8.9 ; 198.82,8.9 198.82,13.22 ; 198.82,8.9 198.82,13.22 ; 198.82,13.22 237.17,13.22 ; 198.82,13.22 237.17,13.22 ; 237.17,13.22 237.17,111.47 ; 237.17,13.22 237.17,111.47

## Silkscreen, mask and mechanical layers (free items; w line width, h text height)
F.Mask:
  region: 198.806,0.445 114.503,0.445 114.503,6.109 198.806,6.109

## Text inside footprints (layer, text, board x,y; h text height)
D1: F.Fab "K" at 223.641,19.741 h1; F.SilkS "K" at 223.641,19.741 h1
D5: F.Fab "K" at 223.748,26.609 h1; F.SilkS "K" at 223.748,26.609 h1
J1: Cmts.User "PCB Thickness 1.57 mm" at 115.868,0.788 h0.5